# EAGLE board Печатная плата принимающая ось Z (EAGLE 9.0.0)
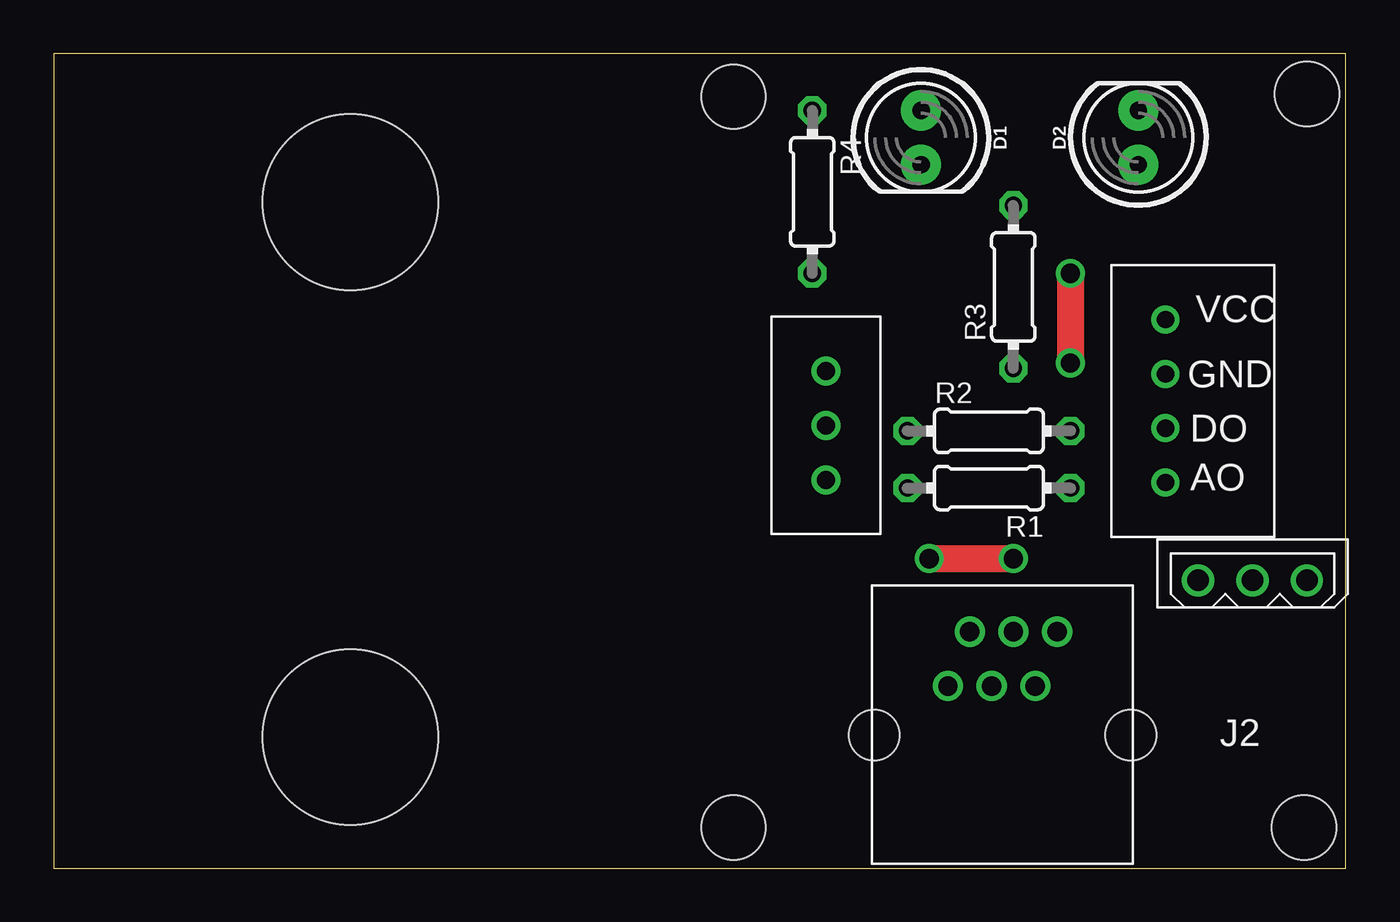
[diagram p0: board, top side]
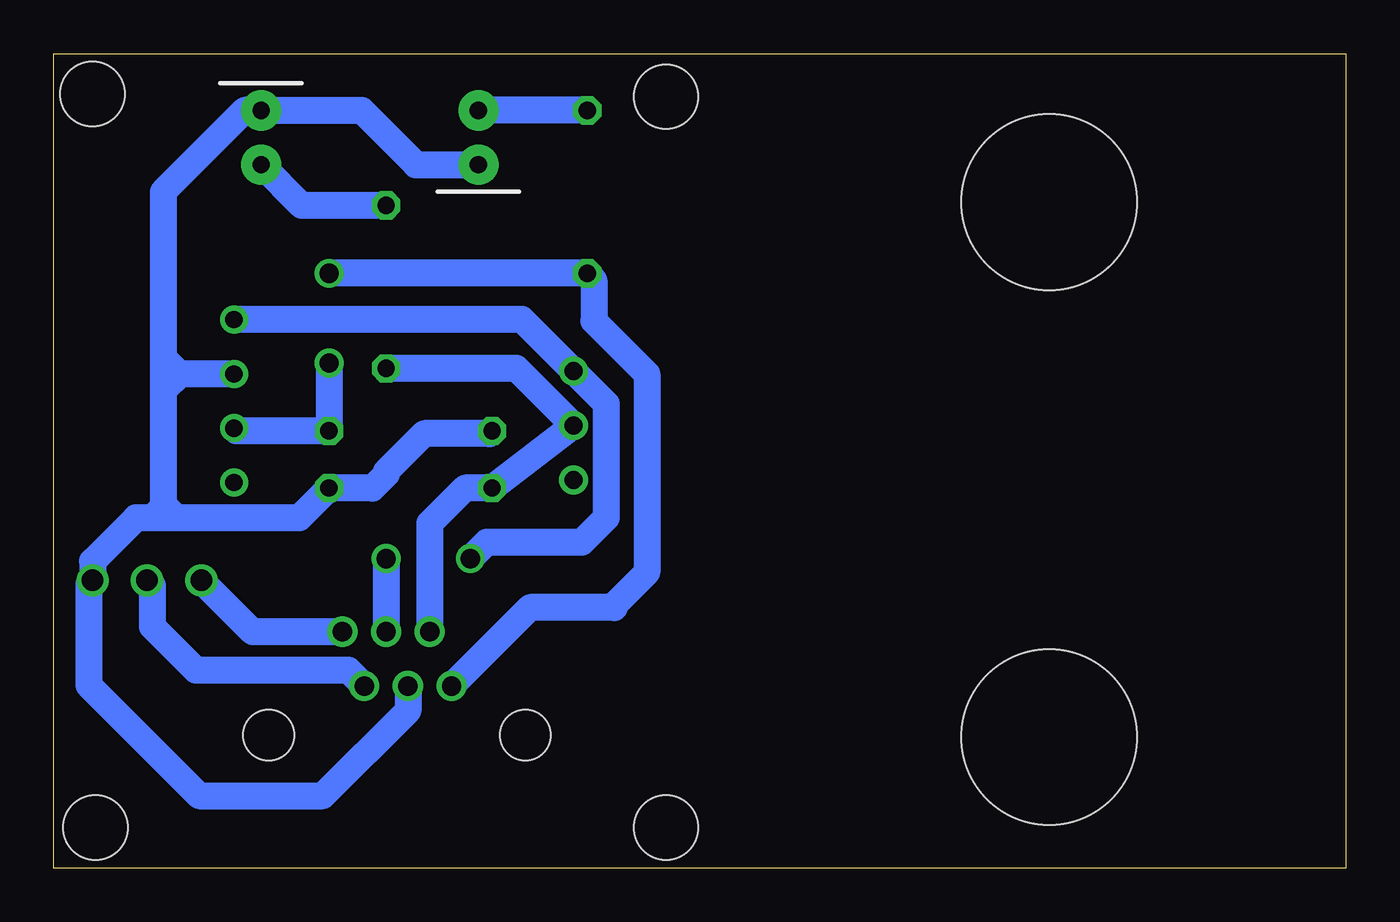
[diagram p1: board, bottom side, seen from below]

Size 60.4 x 38.09 mm. Coordinates in mm from the lower left corner, seen from the top.
Outline: 0,0 60.4,0 60.4,38.09 0,38.09 0,0
Copper layers (1*16): Top 0.035mm / dielectric 1.5mm / Bottom 0.035mm
Design rules "default": minimum track width 6mil, minimum drill 0.35mm, track to track 6mil, track to pad 6mil, pad to pad 6mil, via to via 6mil, smd to smd 6mil, copper to edge 40mil, drill to drill 6mil, minimum pad ring 10mil, minimum via ring 8mil, stop-mask expansion 4mil, vias tented up to drill 0mil, thermal gap 10mil
Holes 3 mm at 31.78,36.07 31.78,1.91 58.45,1.91 58.58,36.2
Holes 8.2 mm at 13.87,31.14 13.87,6.14

## Footprints (pad centres in the part's own frame; a part is rotated, then mirrored left to right if it is on the bottom)
LED_5MM = drill 0.813 pad 1.88: A -1.27,0; K 1.27,0
5267-3 = drill 1: 1 0,0; 2 -2.54,0; 3 -5.08,0
615006138421 = drill 0.9: 1 2.55,4.84; 2 1.53,2.3; 3 0.51,4.84; 4 -0.51,2.3; 5 -1.53,4.84; 6 -2.55,2.3 | hole 2.36: -6,0; 6,0
0204/7 = drill 0.813 octagon: 1 -3.81,0; 2 3.81,0
OPTICAL_ENCODER_FC-01 = drill 0.8: AO 2.54,0; DO 0,0; GND -2.54,0; VCC -5.08,0
ENDSTOP = drill 0.85: COM -7.62,0; NC -2.54,0; NO -5.08,0

## Placement (x,y rotation side)
D1  [LED_5MM]  40.54,34.16 270 top
D2  [LED_5MM]  50.7,34.16 90 top
J1  22-03-5035  [5267-3]  58.58,13.46 0 top
J2  [615006138421]  44.35,6.22 0 top
R1  10K  [0204/7]  43.72,17.78 180 top
R2  10K  [0204/7]  43.72,20.45 0 top
R3  [0204/7]  44.86,27.18 90 top
R4  [0204/7]  35.46,31.62 270 top
U$1  OPTICAL_ENCODER_FC-01  [OPTICAL_ENCODER_FC-01]  51.97,20.57 270 top
U$2  ENDSTOP  [ENDSTOP]  36.1,25.78 90 top

## Library data of the parts
D1 D2 = SparkFun-LED
J1 = molex
J2 = Wurth_Elektronik_Electromechanic_Input-Output_Connectors_rev16a
R1-R4 = resistor
U$1 U$2 = other components

## Nets
3.3V: J2.3 U$1.VCC U$2.NC
12V: J1.2 J2.2
ENCODER: J2.6 R2.2 R4.2 U$1.DO
ENDSTOP: J2.5 R1.2 R3.1 U$2.NO
GND: D1.K D2.K J1.1 J2.4 R1.1 R2.1 U$1.GND
N$1: D2.A R3.2
N$2: D1.A R4.1
RX/TX: J1.3 J2.1

## Tracks (layer width: path | path; a pad name or v marks a point on that pad's centre or on a via)
3.3V  (via drill 0.9)
  Top 1.27: v40.92,14.48 v44.86,14.48
  Bottom 1.27: U$1.VCC 38.51,25.65 U$2.NC 34.57,21.72 34.57,16.38 35.72,15.24 40.16,15.24 v40.92,14.48 | v44.86,14.48 J2.3
12V
  Bottom 1.27: J2.2 46.63,9.27 53.75,9.27 55.78,11.3 55.78,13.21 J1.2
ENCODER  (via drill 0.9)
  Top 1.27: v47.53,27.81 v47.53,23.62
  Bottom 1.27: U$1.DO 51.84,20.45 R2.2 v47.53,23.62 | v47.53,27.81 R4.2 35.14,27.5 35.14,25.59 32.67,23.11 32.67,13.84 34.19,12.32 34.19,12.19 38.13,12.19 J2.6
ENDSTOP
  Bottom 1.27: R3.1 38.76,23.37 U$2.NO R1.2 41.16,17.78 42.82,16.12 J2.5
GND
  Bottom 1.27: R2.1 40.03,20.32 43.08,20.32 44.86,18.54 44.86,18.41 45.49,17.78 R1.1 48.92,16.38 54.64,16.38 | 54.64,16.38 55.78,16.38 | 55.78,16.38 56.54,16.38 58.58,14.35 J1.1 58.75,13.28 58.75,8.56 53.59,3.39 47.82,3.39 43.84,7.37 J2.4 | U$1.GND 54.51,23.11 | 54.51,23.11 55.27,22.35 | 55.27,22.35 55.27,17.02 | 55.27,17.02 54.64,16.38 | 55.27,17.02 55.27,16.89 55.78,16.38 | 55.27,23.88 55.27,31.62 51.46,35.43 D2.K 46,35.43 43.46,32.89 D1.K | 55.27,23.88 55.27,22.35 | 54.51,23.11 55.27,23.88
N$1
  Bottom 1.27: R3.2 48.8,30.99 D2.A
N$2
  Bottom 1.27: R4.1 D1.A
RX/TX
  Bottom 1.27: J2.1 51.1,11.06 J1.3